# EAGLE board Panel V2 (EAGLE 7.2.0)
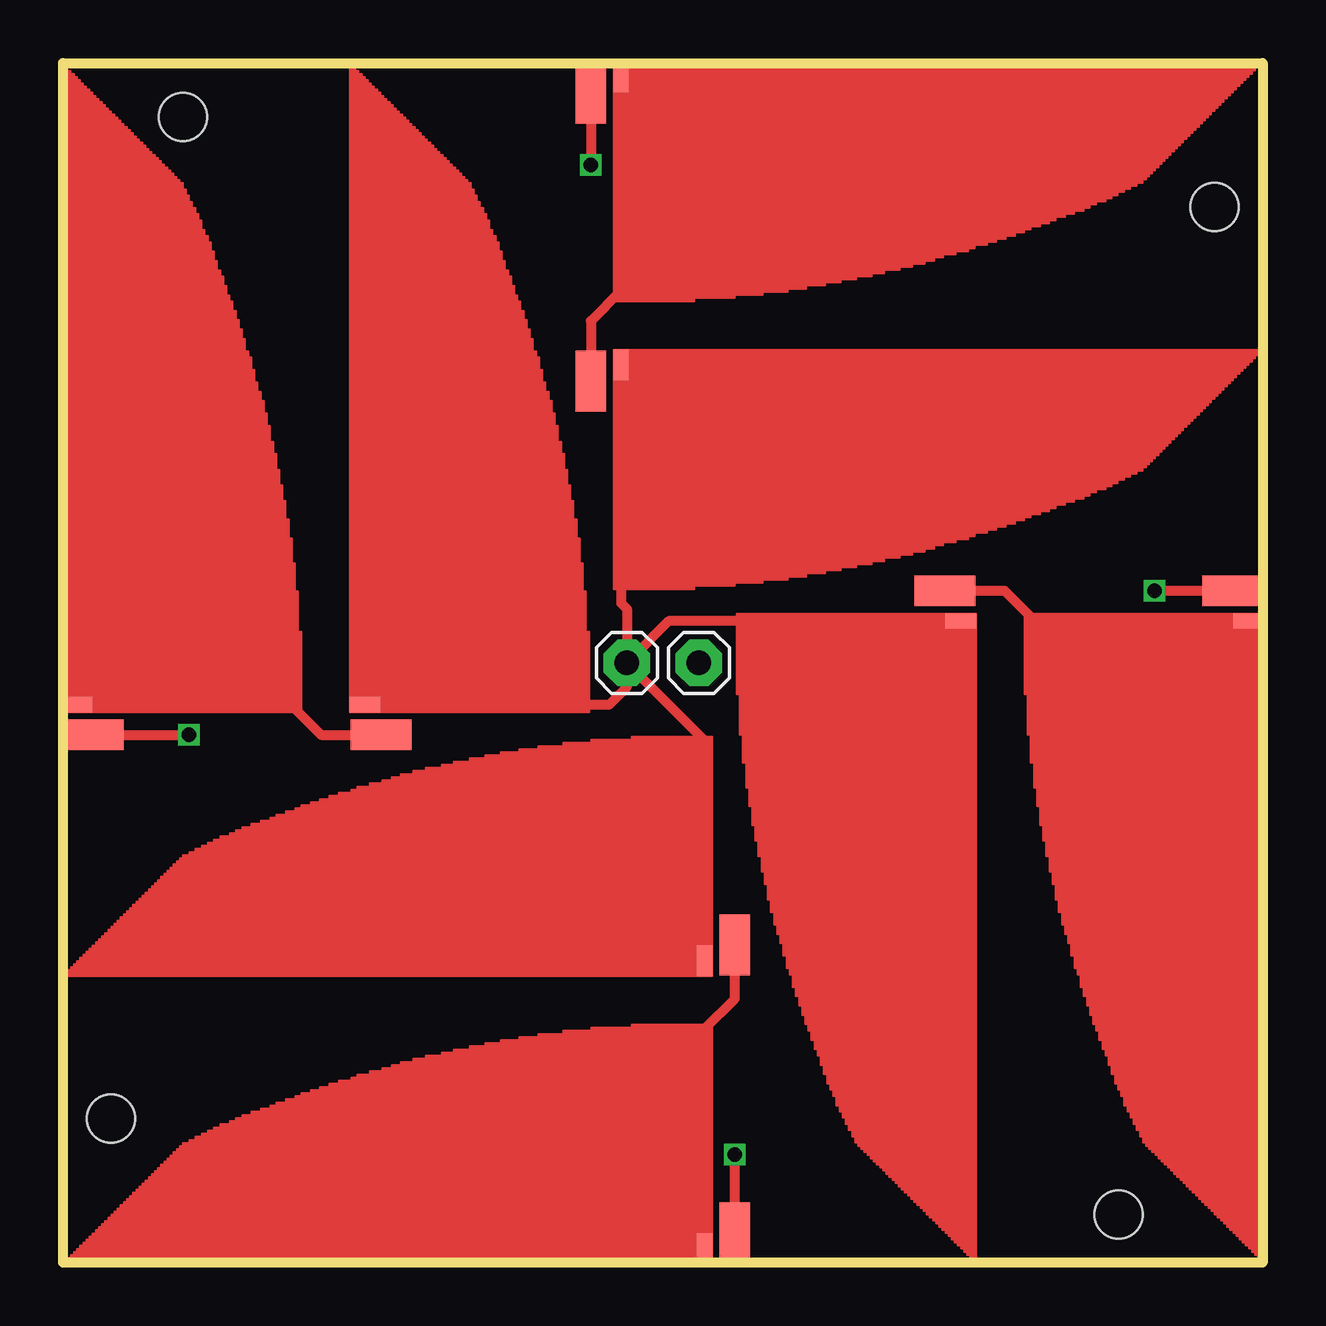
[diagram p0: board, top side]
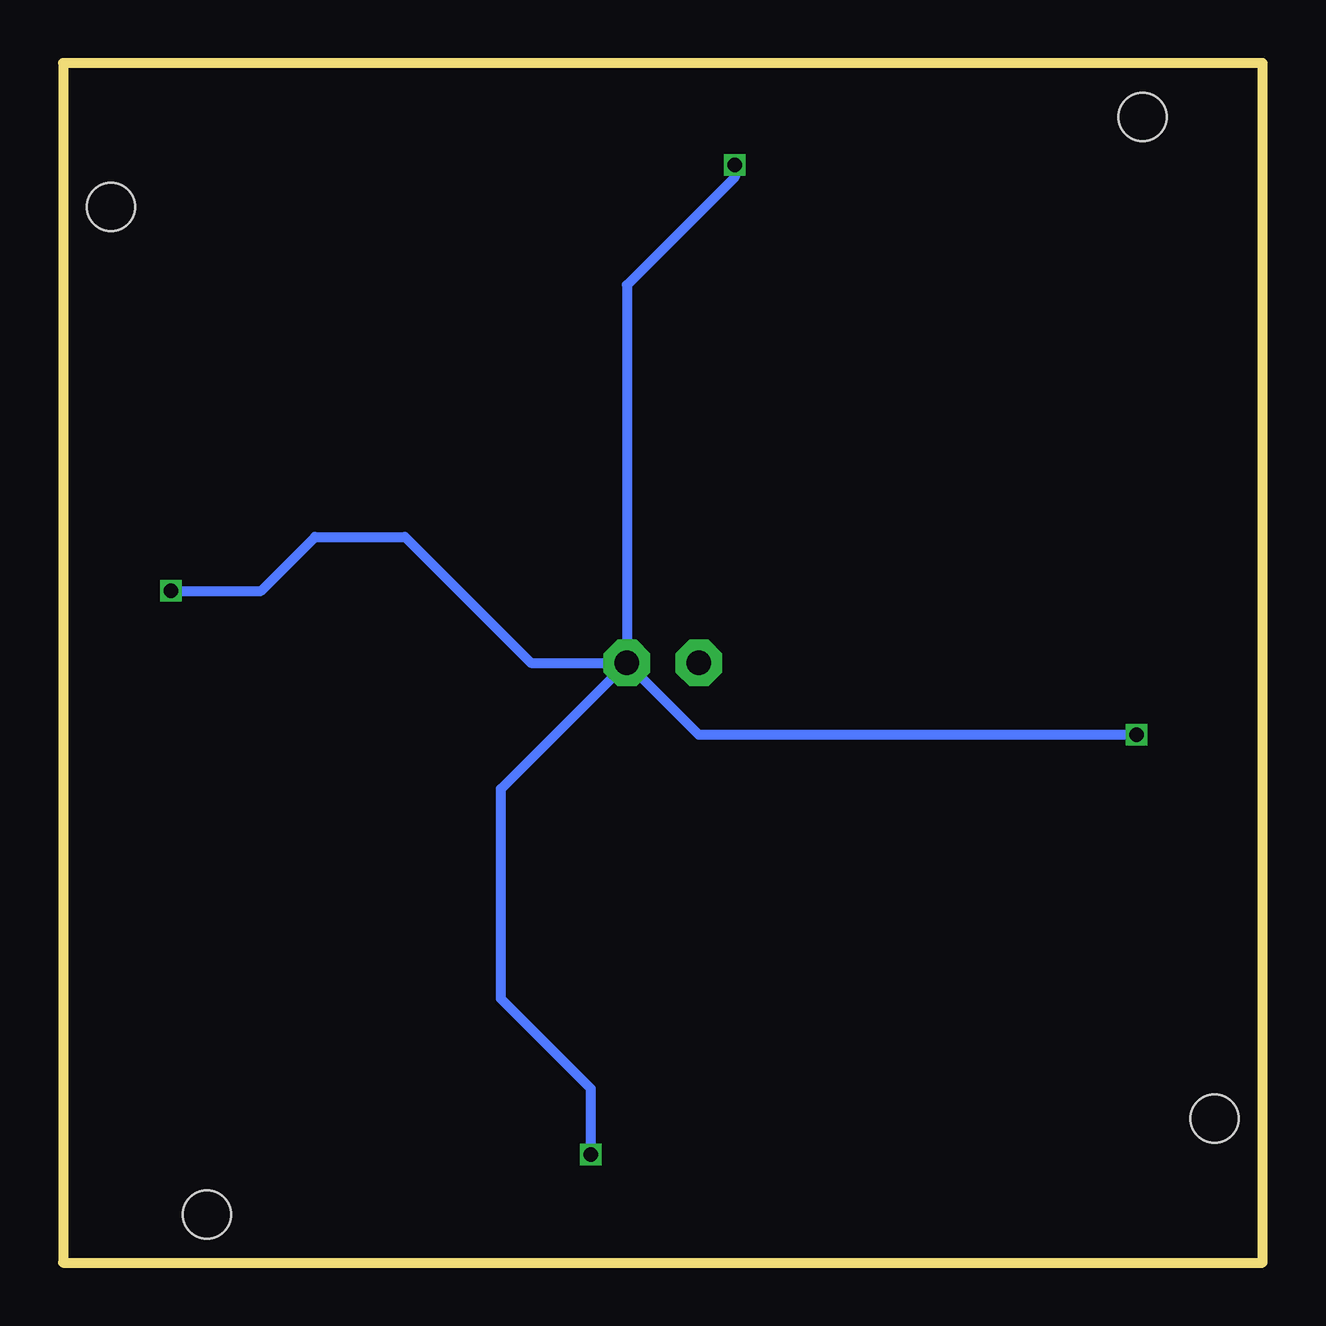
[diagram p1: board, bottom side, seen from below]

Size 50 x 50 mm. Coordinates in mm from the lower left corner, seen from the top.
Outline: 0,0 0,50 50,50 50,0 0,0
Copper layers (1*16): Top 0.035mm / dielectric 1.5mm / Bottom 0.035mm
Design rules "SeeedStudio_2layer_DRU_no_angle_20140221": minimum track width 6mil, minimum drill 12mil, track to track 6mil, track to pad 6mil, pad to pad 6mil, via to via 6mil, smd to smd 0mil, copper to edge 10mil, drill to drill 10mil, minimum pad ring 10mil, minimum via ring 6mil, stop-mask expansion 2mil, vias tented up to drill 100mil, thermal gap 10mil
Holes 2 mm at 5,47.75 2,6 44,2 48,44

## Footprints (pad centres in the part's own frame; a part is rotated, then mirrored left to right if it is on the bottom)
TRISOLX = smd 1.27 x 0.635: P$1 0.584,0.26
1X01 = drill 1.016 pad 1.93 octagon: 1 0,0
SMD1,27-2,54 = smd 1.27 x 2.54: 1 0,0

## Placement (x,y rotation side)
E$1  [TRISOLX]  0,23 0 top
E$2  [TRISOLX]  12,23 0 top
E$3  [TRISOLX]  27,0 90 top
E$4  [TRISOLX]  27,12 90 top
E$5  [TRISOLX]  50,27 180 top
E$6  [TRISOLX]  38,27 180 top
E$7  [TRISOLX]  23,50 270 top
E$8  [TRISOLX]  23,38 270 top
E$9  [1X01]  23.5,25 0 top
E$10  [1X01]  26.5,25 0 top
E$11  [SMD1,27-2,54]  1.25,22 90 top
E$12  [SMD1,27-2,54]  13.25,22 270 top
E$13  [SMD1,27-2,54]  28,1.25 180 top
E$14  [SMD1,27-2,54]  28,13.25 180 top
E$15  [SMD1,27-2,54]  36.75,28 270 top
E$16  [SMD1,27-2,54]  48.75,28 270 top
E$17  [SMD1,27-2,54]  22,36.75 180 top
E$18  [SMD1,27-2,54]  22,48.75 180 top

## Library data of the parts
E$1-E$8 = trisolx
E$9 E$10 = adafruit
E$11-E$18 = wirepad

## Nets
S$1: E$1.P$1 E$12.1
S$2: E$3.P$1 E$14.1
S$3: E$2.P$1 E$4.P$1 E$6.P$1 E$8.P$1 E$9.1
S$4: E$5.P$1 E$15.1
S$5: E$7.P$1 E$17.1
S$6: E$10.1 E$11.1 E$13.1 E$16.1 E$18.1

## Tracks (layer width: path | path; a pad name or v marks a point on that pad's centre or on a via)
S$1
  Top 0.406: E$1.P$1 9.49,23.26 10.75,22 E$12.1
S$2
  Top 0.406: E$3.P$1 26.74,9.74 28,11 E$14.1
S$3
  Top 0.406: E$2.P$1 22.74,23.26 22.75,23.25 23.5,24 E$9.1 | E$8.P$1 23.26,27.49 23.5,27.25 E$9.1 | E$4.P$1 26.74,21.76 E$9.1 | E$6.P$1 25.24,26.74 E$9.1
S$4
  Top 0.406: E$5.P$1 40.51,26.74 39.25,28 E$15.1
S$5
  Top 0.406: E$7.P$1 23.26,40.51 22,39.25 E$17.1 22,36.25
S$6  (via drill 0.6)
  Top 0.406: E$13.1 v28,4.5 | E$11.1 v5.25,22 | E$18.1 v22,45.75 | E$16.1 v45.5,28
  Bottom 0.406: v28,4.5 28,7.25 31.75,11 31.75,19.75 E$10.1 | v5.25,22 23.5,22 E$10.1 | v22,45.75 22,45.25 26.5,40.75 E$10.1 | v45.5,28 41.75,28 39.5,30.25 35.75,30.25 30.5,25 E$10.1

## Text on the board
tDocu: + | -